# Altium PCB 403.5MHz_LNA.PcbDoc
Units mil, origin at the board's own origin, x right, y up, seen from the top; angles counter-clockwise.
Board outline 1897.64 x 1078.74 mil, 2 copper layers (Top Layer, Bottom Layer), stack 26.422 mil thick; 35 components, 14 nets, 115 pads, 114 vias.
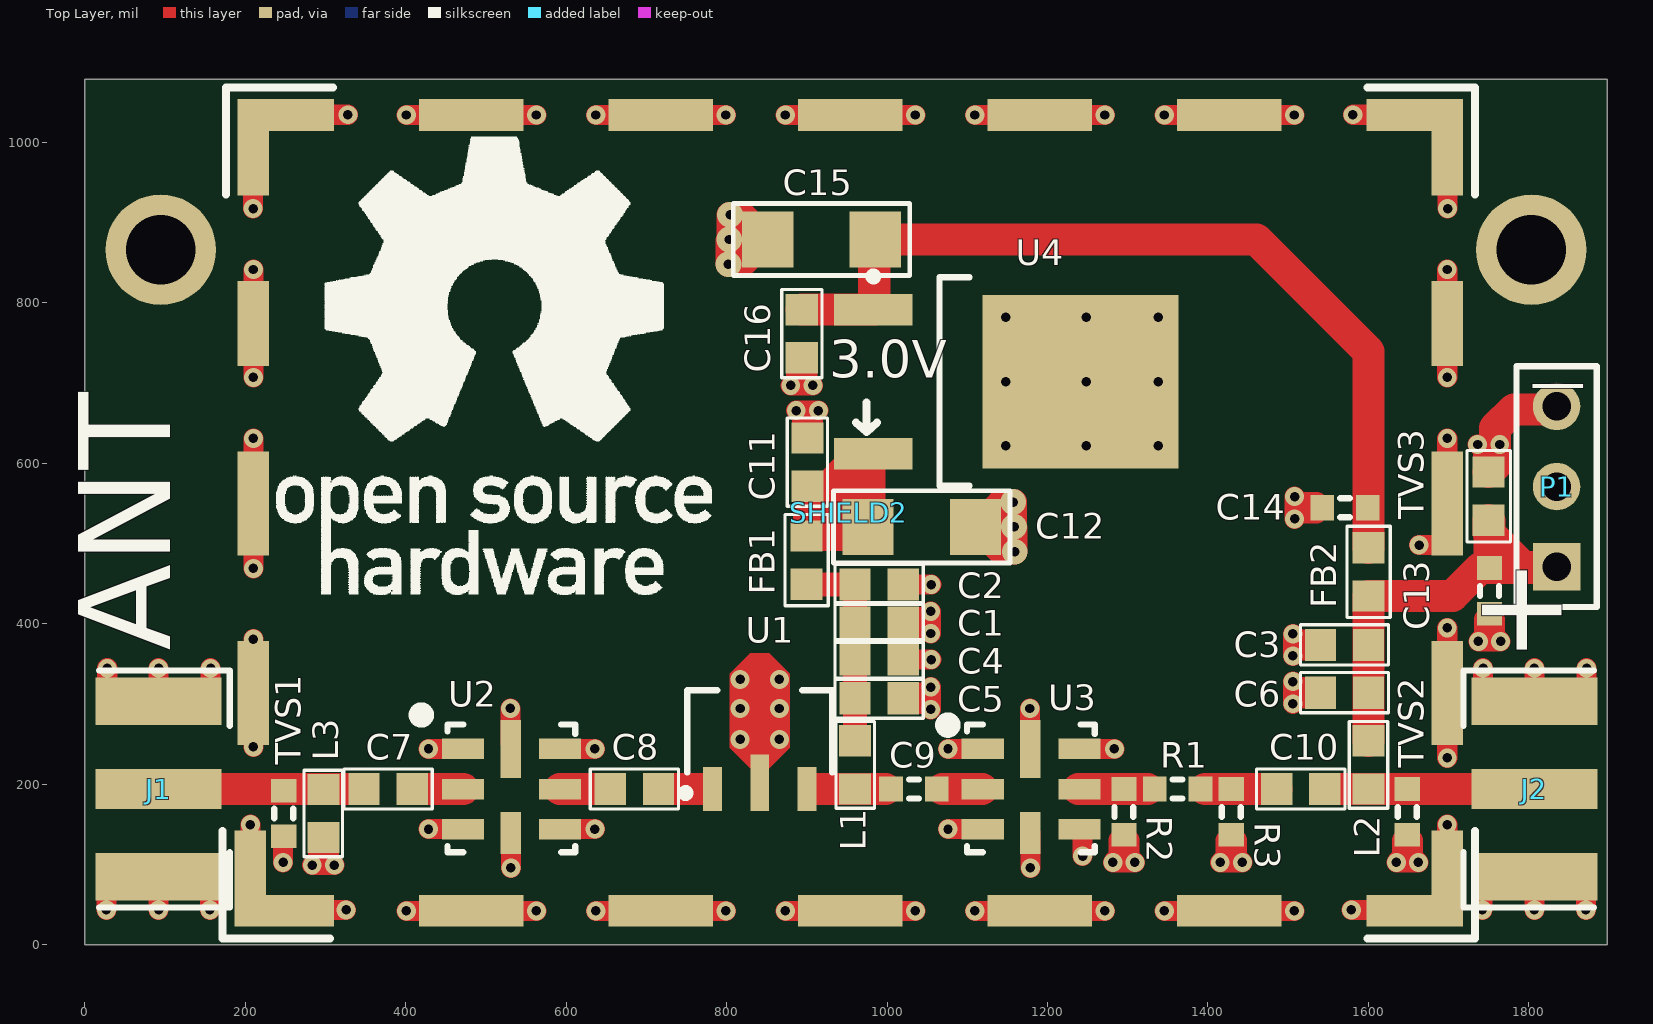
[diagram p0: Top Layer view]
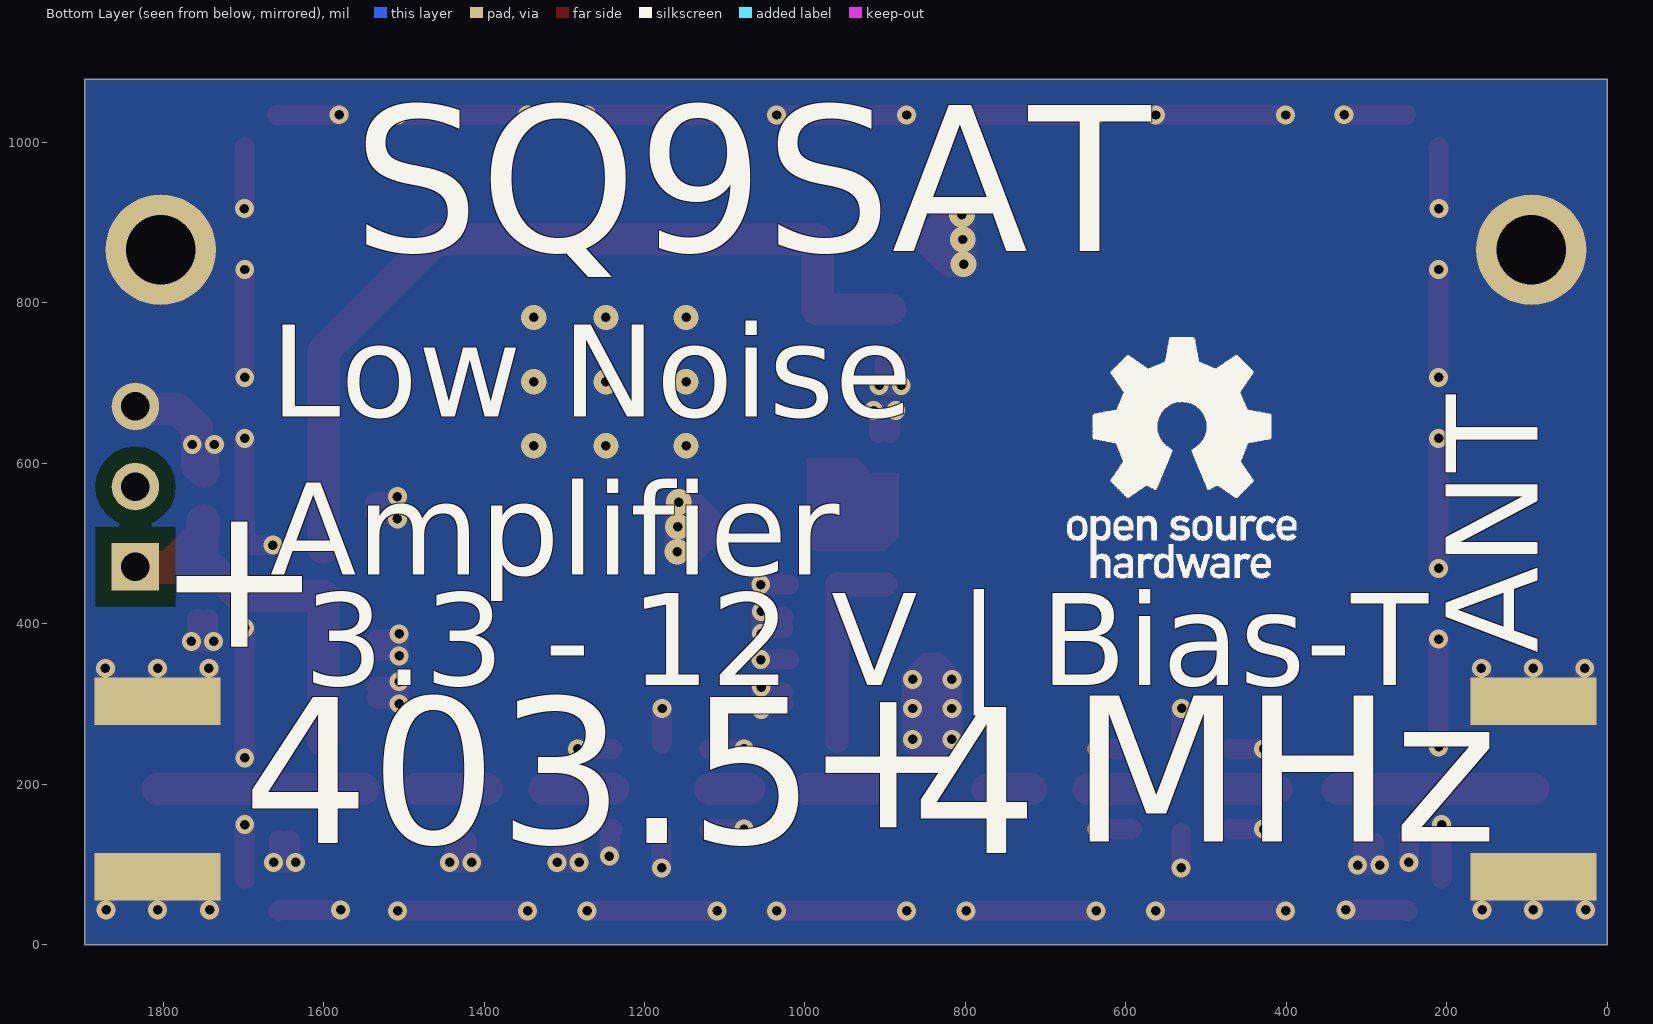
[diagram p1: Bottom Layer view, seen from below]
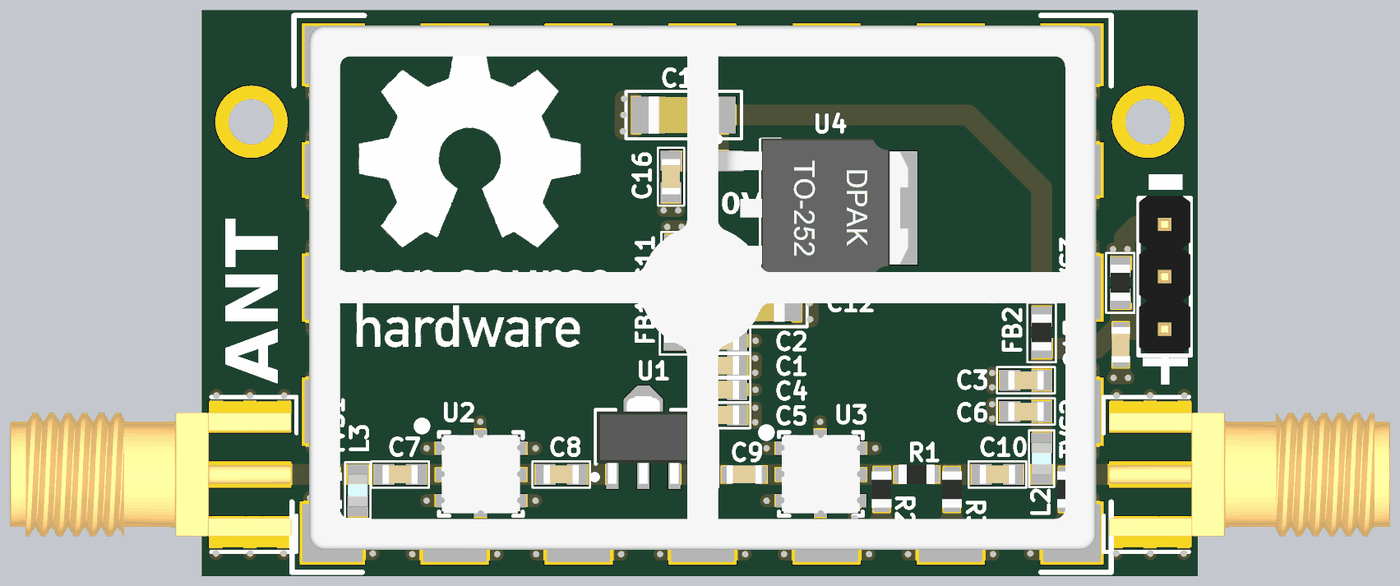
[diagram p2: 3D render of the assembled board from above, using the file's embedded part models]

## Layer stack, top to bottom
Top Solder: solder mask 0.4, Solder Resist, Dk 3.5
Top Layer: signal copper 1.4
Dielectric 1: core 23.622, FR-4, Dk 4.2
Bottom Layer: signal copper 1.4
Bottom Solder: solder mask 0.4, Solder Resist, Dk 3.5

## Board outline
0,0 0,1078.74 1897.64,1078.74 1897.64,0

## Design rules (kind name [scope] priority, off if disabled: settings)
AssemblyTestPointUsage [All] p1 off:
AssemblyTestpoint [All] p1 off: testpointundercomponent=TRUE minsize=40 maxsize=100 preferedsize=60 minholesize=0 maxholesize=40 preferedholesize=32 testpointgrid=1 usegrid=TRUE gridtolerance=0.01 allowsidetop=TRUE allowsidebottom=TRUE
Clearance [All] p1: gap=6 ignorepadtopadclearanceinfootprint=FALSE except(20: Arc-Poly Track-Poly SMDPad-Poly THPad-Poly Via-Poly Fill-Poly Poly-Poly Poly-Region Poly-Text Poly-Hole)
ComponentClearance R3_R4 [InComponent('R3') vs InComponent('R4')] p1: gap=0 collisioncheckmode=3 verticalgap=0 showdistances=FALSE
ComponentClearance R1_R2 [InComponent('R1') vs InComponent('R2')] p2: gap=0 collisioncheckmode=3 verticalgap=0 showdistances=FALSE
ComponentClearance ComponentClearance_PAD_08mm [HasFootprint('PAD_08mm')] p3: gap=0 collisioncheckmode=3 verticalgap=0 showdistances=FALSE
ComponentClearance ComponentClearance_1 [All vs InComponent('J4')] p4: gap=0 collisioncheckmode=3 verticalgap=0 showdistances=FALSE
ComponentClearance [All] p5: gap=10 collisioncheckmode=3 verticalgap=10 showdistances=FALSE
FabricationTestPointUsage [All] p1 off: valid=0 allowmultiple=FALSE
FabricationTestpoint [All] p1 off: side=3 testpointundercomponent=TRUE minsize=40 maxsize=100 preferedsize=60 minholesize=0 maxholesize=40 preferedholesize=32 testpointgrid=1 allowsidetop=TRUE allowsidebottom=TRUE usegrid=TRUE gridtolerance=0.01
HoleSize [All] p1: absolutevalues=TRUE maxlimit=157.48 minlimit=11.81 maxpercent=80.000 minpercent=20.000
Length "InNet('USBDP_CON') Or InNet('USBDM_CON')" [InNet('USBDP_CON') Or InNet('USBDM_CON')] p1: maxlimit=650 minlimit=550
MinimumSolderMaskSliver MSOP8_TSSOP8_3X3 [HasFootprint('MSOP8_TSSOP8_3X3')] p1: minsoldermaskwidth=3
MinimumSolderMaskSliver DFN8_3.0x2.0 [HasFootprint('DFN8_3.0x2.0')] p2: minsoldermaskwidth=3
MinimumSolderMaskSliver 6L2MM [HasFootprint('6L2MM')] p3: minsoldermaskwidth=3
MinimumSolderMaskSliver QFN16_3x3 [HasFootprint('QFN16_3x3')] p4: minsoldermaskwidth=3
MinimumSolderMaskSliver 0915LP15B026 [HasFootprint('0915LP15B026')] p5: minsoldermaskwidth=3
MinimumSolderMaskSliver PD0810J5050S2HF [HasFootprint('PD0810J5050S2HF')] p6: minsoldermaskwidth=3
MinimumSolderMaskSliver [All] p7: minsoldermaskwidth=6
PlaneClearance [All] p1: clearance=9.84
PlaneConnect PlaneConnect_via [All] p1: planeconnectstyle=Direct reliefexpansion=20 reliefentries=4 reliefconductorwidth=10 reliefairgap=10
PlaneConnect [All] p2: planeconnectstyle=Relief reliefexpansion=20 reliefentries=4 reliefconductorwidth=10 reliefairgap=10
PolygonConnect PolygonConnect_1 [HasFootprint('BMI-S-205-F')] p1: connectstyle=Direct reliefconductorwidth=10 reliefentries=4 polygonreliefangle="90 Angle" airgapwidth=10
PolygonConnect PolygonConnect_via [isVia] p2: connectstyle=Direct reliefconductorwidth=10 reliefentries=4 polygonreliefangle="90 Angle" airgapwidth=10
PolygonConnect [All] p3: connectstyle=Direct reliefconductorwidth=20 reliefentries=4 polygonreliefangle="90 Angle" airgapwidth=12
RoutingVias [All] p1: holewidth=5.91 width=21.65 viastyle="Through Hole" minholewidth=11.81 minwidth=23.62 maxholewidth=39.37 maxwidth=50
SilkToSilkClearance [All] p1: silktosilkclearance=1
SilkToSolderMaskClearance [IsPad] p1: minsilkscreentomaskgap=0 clearancetoexposedcopper=TRUE
SolderMaskExpansion [All] p1: expansion=2
Width [All] p1: maxlimit=118.11 minlimit=5.91 preferedwidth=9.84
19 further rules are at their usual default settings.

## Classes and differential pairs
net class "50 ohm": NetC7_1 NetC7_2 NetC8_1 NetC8_2 NetC9_1 NetC9_2 NetC10_1 NetR1_1

## Components (designator, comment, footprint, x,y, rotation, side; value= is the part's Value field where it differs from the comment)
C1 "Ceramic X7R" C_0603_1608#1 990.16,401.57 r180 top value=100nF
C2 "Ceramic X7R" C_0603_1608#1 990.16,448.82 r0 top value=1uF
C3 "Ceramic C0G" C_0603_1608#1 1570.24,373.63 r180 top value=1nF
C4 "Ceramic C0G" C_0603_1608#1 990.16,355.32 r180 top value=1nF
C5 "Ceramic C0G" C_0603_1608#1 990.16,307.09 r0 top value=100pF
C6 "Ceramic C0G" C_0603_1608#1 1570.24,313.98 r180 top value=100pF
C7 "Ceramic C0G" C_0603_1608#1 377.95,193.9 r0 top value=100pF
C8 "Ceramic C0G" C_0603_1608#1 685.04,193.9 r0 top value=100pF
C9 "Ceramic C0G" C_0603_1608#2 1033.46,193.91 r0 top value=100pF
C10 "Ceramic C0G" C_0603_1608#1 1515.75,193.9 r0 top value=100pF
C11 "Ceramic X7R" C_0603_1608#1 900.59,601.38 r90 top value=1uF
C12 "Ceramic X7R" C_1206_3216 1043.31,520.67 r0 top value=10uF
C13 "Ceramic C0G" C_0603_1608#2 1750.98,440.94 r270 top value=100pF
C14 "Ceramic C0G" C_0603_1608#2 1570.87,544.56 r180 top value=100pF
C15 "Ceramic X7R" C_1206_3216 918.31,878.94 r180 top value=10uF
C16 "Ceramic X7R" C_0603_1608#1 893.7,761.54 r270 top value=1uF
FB1 "Ferrite bead" FB_0603_1608 899.61,479.33 r270 top value=BLM18AG601SN1
FB2 "Ferrite bead" FB_0603_1608 1600.24,464.57 r90 top value=BLM18AG601SN1
J1 "SMA EDGE" J_SMA_EDGE_6.25 13.13,193.91 r0 top value=RF2-143-T-17-50-G
J2 "SMA EDGE" J_SMA_EDGE_6.25 1885.83,193.91 r180 top value=RF2-143-T-17-50-G
L1 "Inductor" L_0603_1608 960.29,223.91 r90 top value=220nH
L2 "Inductor" L_0603_1608 1600.24,223.91 r90 top value=220nH
L3 "Inductor" L_0603_1608 297.24,163.39 r90 top value=220nH
P1 "Goldpin" P_HEADER_1x3_2.54 1834.65,470.87 r90 top value=DS1021-1*3SF1-1
R1 "Resistor" R_0603_1608#1 1362.2,193.91 r0 top value=18R
R2 "Resistor" R_0603_1608#1 1295.28,165.37 r90 top value=270R
R3 "Resistor" R_0603_1608#1 1429.13,165.37 r90 top value=270R
SHIELD2 "EMI Shield" BMI-S-205-F 954.22,549.91 r0 top locked value=BMI-S-205-F
TVS1 "TVS bidirectional" R_0603_1608#1 248.03,163.39 r270 top value=0603ESDA-MLP7
TVS2 "TVS bidirectional" R_0603_1608#1 1648.62,165.35 r270 top value=0603ESDA-MLP7
TVS3 "0603ESDA2" R_0603_1608#2 1750,559.06 r90 top value=0603ESDA2-TR2
U1 "PGA103+" SOT89_TO-243AA_N 841.29,264.78 r0 top value=PGA-103+
U2 "RF1419D" SAW_QCC8B_SM3838-8_3.8x3.8 471.65,243.91 r0 top
U3 "RF1419D" SAW_QCC8B_SM3838-8_3.8x3.8 1119.29,243.9 r0 top
U4 "AP2213D-3.0" DPAK_TO252-3_SC63_M 1148.14,701.77 r0 top value=AP2213D-3.0TRG1

## Footprints (in the part's own frame and the unit in brackets; to place one, negate y for a bottom-side part, rotate by r counter-clockwise, add the part's x,y. Pads: shape width x height; smd on the part's side, far side on the other; paste and mask are expansions set on the pad)
BMI-S-205-F [mm]
  rect 1x3.05 smd paste-0.127: 1(-19,-11.875) 1(-18.9,11.275) 1(18.9,-11.875) 1(18.9,11.275)
  rect 1x3.3 smd paste-0.127: 1(-18.9,-6) 1(-18.9,0) 1(18.9,-6) 1(18.9,0)
  rect 1x2.7 smd paste-0.127: 1(-18.9,5.7) 1(18.9,5.7)
  rect 3.15x1 smd paste-0.127: 1(-17.925,-12.9)
  rect 3.05x1 smd paste-0.127: 1(-17.875,12.3) 1(17.875,-12.9) 1(17.875,12.3)
  rect 3.3x1 smd paste-0.127: 1(-12,-12.9) 1(-12,12.3) 1(-6,-12.9) 1(-6,12.3) 1(0,-12.9) 1(0,12.3) 1(6,-12.9) 1(6,12.3) 1(12,-12.9) 1(12,12.3)
  silkscreen extent -19.87,-13.78 19.77,13.18, body extent -19.05,-12.7 19.05,12.7, height 6
C_0603_1608#1 [mil]
  rect 39x40 smd: 1(-30,0) 2(30,0)
  silkscreen extent -55,-25 55,25, body extent -33,-18 33,18, height 35
C_0603_1608#2 [mil]
  rect 29.53x31.5 smd: 1(-28.54,0) 2(28.54,0)
  silkscreen extent -6,-12 6,12, body extent -33,-18 33,18, height 35
C_1206_3216 [mil]
  rect 64x70 smd: 1(-67,0) 2(67,0)
  silkscreen extent -110,-45 110,45, body extent -67,-35 67,35, height 39
DPAK_TO252-3_SC63_M [mm] "D-PAK, 3-Pads+1-heatsink, Body 6,20x6,60mm (max), IPC Medium Density"
  rect 2.5x1 smd: 1(-4.2,2.28) 3(-4.2,-2.28)
  rect 6.2x5.5 smd: 2(2.362,0)
  silkscreen extent -4.32,-3.3 -1.15,3.45, body extent -5.08,-3.37 5.02,3.37, height 2.37
FB_0603_1608 [mil]
  rect 39x40 smd: 1(-30,0) 2(30,0)
  silkscreen extent -57,-27 57,27, body extent -34,-19 34,19, height 21
J_SMA_EDGE_6.25 [mm]
  rect 4x1.27 smd paste-5: 1(2,0)
  rect 4x1.5 smd paste-5: 2(2,-2.775) 2(2,2.775)
  rect 4x1.5 smd far side paste-5: 2(2,-2.775) 2(2,2.775)
  silkscreen extent 0.13,-3.75 4.25,3.75, body extent -9.6,-3 4,3, height 3.5
L_0603_1608 [mil]
  rect 39x40 smd: 1(-30,0) 2(30,0)
  silkscreen extent -54,-24 54,24, body extent -31,-20 32,20, height 31
P_HEADER_1x3_2.54 [mm] "Connector; Header; 3 Position, Male"
  rect 1.5x1.5 hole 0.9: 1(0,0)
  round 1.5 hole 0.9: 2(2.54,0) 3(5.08,0)
  silkscreen extent -1.27,-1.27 6.35,1.27, body extent -1.17,-1.25 6.45,1.25, height 8.2
R_0603_1608#1 [mm]
  rect 0.75x0.8 smd: 1(-0.725,0) 2(0.725,0)
  silkscreen extent -0.15,-0.3 0.15,0.3, body extent -0.87,-0.47 0.88,0.48, height 0.54
R_0603_1608#2 [mm]
  rect 0.991x1.016 smd: 1(-0.762,0) 2(0.762,0)
  silkscreen extent -1.45,-0.69 1.45,0.69, body extent -0.87,-0.47 0.88,0.48, height 0.54
SAW_QCC8B_SM3838-8_3.8x3.8 [mm]
  rect 1.33x0.65 smd: 1(0,0) 2(0,-1.27) 3(0,-2.54) 5(3.07,-2.54) 6(3.07,-1.27) 7(3.07,0)
  rect 0.65x1.33 smd: 4(1.51,-2.667)
  rect 0.65x1.83 smd: 8(1.51,0)
  silkscreen extent -1.45,-3.27 3.55,1.2, body extent -0.37,-3.15 3.43,0.65, height 1.52
SOT89_TO-243AA_N [mm] "SOT89, 3-Leads, Body 4,50x2,45mm, Pitch 1,50mm, Lead Span 4,1mm, IPC Medium Density"
  rect 0.6x1.4 smd: 1(-1.5,-1.8) 3(1.5,-1.8)
  rect 0.6x1.8 smd: 2(0,-1.6)
  Top Layer region: -0.228,-1.219 -0.95,-0.498 -0.95,1.85 -0.3,2.5 0.3,2.5 0.95,1.85 0.95,-0.498 0.229,-1.219
  silkscreen extent -2.47,-2.05 2.3,1.32, body extent -2.25,-2.25 2.25,3.05, height 1.59

## Part data
C1: library part C_100nF_50V_X7R_0603_5, "Capacitor", Dielectric=X7R, Manufacturer=Samsung, Manufacturer Part Number=CL10B104JB8NNNC, Tolerance (%)=5, Voltage=50V, HelpURL=http://www.tme.eu/pl/Document/4a42202b32dab16128fe107dd69598cc/samsung-chip-cap.pdf, Part Number=C_100nF_50V_X7R_0603_5, SCH_Footprint=0603, Supplier 1=TME, Supplier 2="RS Components", Supplier 3=Farnell, Supplier 4=Mouser, Supplier 5=Digi-Key, Supplier Part Number 1=CL10B104JB8NNNC
C2 C11 C16: library part C_1uF_25V_X7R_0603_10, "Capacitor", Dielectric=X7R, Manufacturer=Samsung, Manufacturer Part Number=CL10B105KA8NNNC, Tolerance (%)=10, Voltage=25V, HelpURL=http://www.tme.eu/pl/Document/4a42202b32dab16128fe107dd69598cc/samsung-chip-cap.pdf, Part Number=C_1uF_25V_X7R_0603_10, SCH_Footprint=0603, Supplier 1=TME, Supplier 2="RS Components", Supplier 3=Farnell, Supplier 4=Mouser, Supplier 5=Digi-Key, Supplier Part Number 1=CL10B105KA8NNNC
C3 C4: library part C_1nF_50V_C0G_0603_5, "Capacitor", Dielectric=C0G, Manufacturer=Samsung, Manufacturer Part Number=CL10C102JB8NNNC, Tolerance (%)=5, Voltage=50V, HelpURL=http://www.tme.eu/pl/Document/7da762c1dbaf553c64ad9c40d3603826/mlcc_samsung.pdf, Part Number=C_1nF_50V_C0G_0603_5, SCH_Footprint=0603, Supplier 1=TME, Supplier 2="RS Components", Supplier 3=Farnell, Supplier 4=Mouser, Supplier 5=Digi-Key, Supplier Part Number 1=CL10C102JB8NNNC
C5 C6 C7 C8 C9 C10 C13 C14: library part C_100pF_50V_C0G_0603_5, "Capacitor", Dielectric=C0G, Manufacturer=Walsin, Manufacturer Part Number=RF18N101J500CT, Tolerance (%)=5, Voltage=50V, HelpURL=https://pl.mouser.com/datasheet/2/210/Microwave_Caps-1535561.pdf, Part Number=C_100pF_50V_C0G_0603_5, SCH_Footprint=0603, Supplier 1=TME, Supplier 2="RS Components", Supplier 3=Farnell, Supplier 4=Mouser, Supplier 5=Digi-Key
C12 C15: library part C_10uF_25V_X7R_1206_10, "Capacitor", Dielectric=X7R, Manufacturer="Samsung Electro-Mechanics", Manufacturer Part Number=CL31B106KAHNNNE, Tolerance (%)=10, Voltage=25V, HelpURL=http://www.tme.eu/pl/Document/4a42202b32dab16128fe107dd69598cc/samsung-chip-cap.pdf, Part Number=C_10uF_25V_X7R_1206_10, SCH_Footprint=1206, Supplier 1=TME, Supplier 2="RS Components", Supplier 3=Farnell, Supplier 4=Mouser, Supplier 5=Digi-Key, Supplier Part Number 1=CL31B106KAHNNNE
FB1 FB2: library part FB_BLM18AG601SN1, "Ferrite Bead", Current=0A5, Manufacturer=Murata, Manufacturer Part Number=BLM18AG601SN1D, Resistance=600R, HelpURL=http://datasheet.octopart.com/BLM18AG601SN1D-Murata-datasheet-11743096.pdf, Part Number=FB_BLM18AG601SN1, SCH_Footprint=0603, Supplier 1=TME, Supplier 2="RS Components", Supplier 3=Farnell, Supplier 4=Mouser, Supplier 5=Digi-Key, Supplier Part Number 2=7241299P, Supplier Part Number 3=1515679, Supplier Part Number 4=81-BLM11A601S, Supplier Part Number 5=490-1014-1-ND
J1 J2: library part J_SMA_EDGE_6.25, "SMA connector", Manufacturer="Adam Tech", Manufacturer Part Number=RF2-143-T-17-50-G, Component Type=Standard, HelpURL=http://www.tme.eu/pl/Document/5895dbb620da9c3499391e7670c4adea/RF2-143-T-17-50-G.pdf, Part Number=J_SMA_EDGE_6.25, SCH_Footprint="SMA EDGE", Supplier 1=TME, Supplier 2="RS Components", Supplier 3=Farnell, Supplier 4=Mouser, Supplier 5=Digi-Key, Supplier Part Number 1=RF2-143-T-17-50-G
L1 L2 L3: library part L_220nH_120mA_0603, "Induction", Current=120mA, Manufacturer=Murata, Manufacturer Part Number=LQW18ANR22G00D, Resistance=2.5R, HelpURL=https://datasheet.octopart.com/LQW18ANR22G00D-Murata-datasheet-11553032.pdf, Part Number=L_220nH_120mA_0603, SCH_Footprint=0603, Supplier 1=TME, Supplier 2="RS Components", Supplier 3=Farnell, Supplier 4=Mouser, Supplier 5=Digi-Key, Supplier Part Number 1=LQW18ANR22G00D, Supplier Part Number 2=7242872, Supplier Part Number 3=9528059, Supplier Part Number 4=81-LQW18ANR22G00D, Supplier Part Number 5=490-6931-1-ND
P1: library part P_HEADER_1x3_2.54, "Header, 3-Pin", Manufacturer=Connfly, Manufacturer Part Number=DS1021-1*3SF1-1, Supplier Part Number 1=ZL201-03G, Component Type=Standard, HelpURL=http://www.tme.eu/en/Document/cc301e58a5da78cb543a94b5a5b7f06a/DS1021.pdf, Part Number=P_HEADER_1x3_2.54, SCH_Footprint="1x3 2.54mm", Supplier 1=TME, Supplier 2="RS Components", Supplier 3=Farnell, Supplier 4=Mouser, Supplier 5=Digi-Key
R1 R2 R3: library part R_GENERIC_0603, Part Number=R_GENERIC_0603, SCH_Footprint=0603, Supplier 1=TME, Supplier 2="RS Components", Supplier 3=Farnell, Supplier 4=Mouser, Supplier 5=Digi-Key
SHIELD2: library part SHIELD_BMI-S-205-F, "Shield, 1 pad", Manufacturer=Laird, Manufacturer Part Number=BMI-S-205-F, HelpURL=https://assets.lairdtech.com/home/brandworld/files/Board%20Level%20Shields%20Catalog%20Download.pdf, Part Number=SHIELD_BMI-S-205-F, SCH_Footprint=38.1x25.4mm, Supplier 1=TME, Supplier 2="RS Components", Supplier 3=Farnell, Supplier 4=Mouser, Supplier 5=Digi-Key, Supplier Part Number 3=2497723, Supplier Part Number 4=739-BMIS-205-F, Supplier Part Number 5=903-1054-1-ND
TVS1 TVS2: library part TVS_0603ESDA-MLP7, Manufacturer=Bussmann, Manufacturer Part Number=0603ESDA-MLP7, Voltage=30V, HelpURL=https://datasheet.octopart.com/0603ESDA-MLP7-Eaton-datasheet-12528739.pdf, Part Number=TVS_0603ESDA-MLP7, SCH_Footprint=0603, Supplier 1=TME, Supplier 2="RS Components", Supplier 3=Farnell, Supplier 4=Mouser, Supplier 5=Digi-Key
TVS3: library part TVS_0603ESDA2, Current=30A, Manufacturer=Bussmann, Manufacturer Part Number=0603ESDA2-TR2, Voltage=14V, HelpURL=http://www.cooperindustries.com/content/dam/public/bussmann/Electronics/Resources/product-datasheets/bus-elx-ds-4419-0603esda2-tr2.pdf, Part Number=TVS_0603ESDA2, SCH_Footprint=0603, Supplier 1=TME, Supplier 2="RS Components", Supplier 3=Farnell, Supplier 4=Mouser, Supplier 5=Digi-Key, Supplier Part Number 1=0603ESDA2-TR2, Supplier Part Number 4=504-0603ESDA2-TR2, Supplier Part Number 5=283-4156-1-ND
U1: library part U_PGA103+, Manufacturer=Mini-Circuits, Manufacturer Part Number=PGA-103+, HelpURL=https://ww2.minicircuits.com/pdfs/PGA-103+.pdf, Part Number=U_PGA103+, SCH_Footprint=SOT89, Supplier 1=TME, Supplier 2="RS Components", Supplier 3=Farnell, Supplier 4=Mouser, Supplier 5=Digi-Key
U2 U3: library part U_RF1419D, Center Frequency (MHz)=403.5, Manufacturer=Murata, Max Power (dBm)=10, Bandwidth (MHz)=7.5, HelpURL=https://wireless.murata.com/datasheet?/RFM/data/rf1419d.pdf, Manufacturer Part Number=RF1419D, Part Number=U_RF1419D, SCH_Footprint=SM3838, Supplier 1=TME, Supplier 2="RS Components", Supplier 3=Farnell, Supplier 4=Mouser, Supplier 5=Digi-Key, Supplier Part Number 2=9082736, Supplier Part Number 4=719-RF1419D, Supplier Part Number 5=583-1065-1-ND
U4: library part VL_AP2213D-3.0TRG1, Current=0.5A, Manufacturer="Diodes Inc", Manufacturer Part Number=AP2213D-3.0TRG1, Voltage=3V, HelpURL=https://pl.mouser.com/datasheet/2/115/AP2213-318105.pdf, Part Number=VL_AP2213D-3.0TRG1, SCH_Footprint=DPAK, Supplier 1=TME, Supplier 2="RS Components", Supplier 3=Farnell, Supplier 4=Mouser, Supplier 5=Digi-Key, Supplier Part Number 4=621-AP2213D-3.0TRG1, Supplier Part Number 5=AP2213D-3.0TRG1-ND

## Free pads (board coordinates)
  round 137.8 hole 86.61: 7(94.49,866.14) 7(1803.15,866.14)

## Via types
v1: diameter 23.62, hole 11.81, Top Layer to Bottom Layer, tented both sides, 99 vias
v2: diameter 31.5, hole 11.81, Top Layer to Bottom Layer, tented bottom, 9 vias
v3: diameter 32, hole 11.81, Top Layer to Bottom Layer, tented both sides, 6 vias

## Nets (pads, with @x,y where several pads share a name; then routed paths per layer and width w, separated by ;. In a path a pad name is that pad's centre, name@x,y a point inside that pad or via, vN(x,y) a via of type N, cw(c..) or ccw(c..) an arc to the next point about the centre after c; other vN are vias at no path point)
+3V: C11.1 C12.1 FB1.1 U4.3
GND: C1.1 C2.2 C3.2 C4.1 C5.2 C6.2 C11.2 C12.2 C13.2 C14.2 C15.2 C16.2 J1.2 J2.2 L3.1 P1.3 pad.7 R2.1 R3.1 SHIELD2.1 TVS1.2 TVS2.2 TVS3.2 U1.2 U2.1 U2.3 U2.4 U2.5 U2.7 U2.8 U3.1 U3.3 U3.4 U3.5 U3.7 U3.8 U4.2 | length 6140.3
  Top Layer w25: v1(26.92,43.34) J1.2@26.92,84.66 ; J1.2@27.87,303.17 v1(27.87,344.49) ; J1.2@91.85,303.15 v1(91.85,344.47) ; v1(91.88,43.35) J1.2@91.88,84.68 ; v1(155.86,43.34) J1.2@155.86,84.66 ; J1.2@156.81,303.17 v1(156.81,344.49) ; SHIELD2.1@206.19,82.39 v1(206.19,149.61) ; v1(209.62,917.32) 209.62,993.31 SHIELD2.1@210.13,993.81 ; v1(210.13,246.48) 210.13,313.69 v1(210.13,380.91) ; v1(210.13,468.92) 210.13,549.91 v1(210.13,630.91) ; v1(210.13,707.11) 210.13,774.32 v1(210.13,841.54) ; v1(247.05,102.36) 247.05,133.86 TVS1.2 ; SHIELD2.1@248.51,42.04 249.83,43.35 v1(325.79,43.35) ; SHIELD2.1@250.48,1034.17 250.76,1034.45 v1(327.73,1034.45) ; L3.1@290.35,127 290.35,105.94 v1(283.46,99.05) v1(311.02,99.05) 304.13,105.94 L3.1@304.13,127 ; v1(400.79,42.04) 481.78,42.04 v1(562.77,42.04) ; v1(400.79,1034.17) 481.78,1034.17 v1(562.77,1034.17) ; v1(428.35,143.91) U2.3 ; v1(428.35,243.91) U2.1 ; U2.8@530.51,251 v1(530.51,294.31) ; v1(531.09,95.61) U2.4 ; U2.5 v1(635.83,143.91) ; U2.7 v1(635.83,243.91) ; v1(637.01,42.04) 718,42.04 v1(798.99,42.04) ; v1(637.01,1034.17) 718,1034.17 v1(798.99,1034.17) ; v1(873.23,42.04) 954.22,42.04 v1(1035.21,42.04) ; v1(873.23,1034.17) 954.22,1034.17 v1(1035.21,1034.17) ; C16.2@886.81,725.15 886.81,704.09 v1(879.92,697.2) v1(907.48,697.2) 900.59,704.09 C16.2@900.59,725.15 ; C11.2@893.7,637.77 893.7,658.82 v1(886.81,665.71) v1(914.37,665.71) 907.48,658.82 C11.2@907.48,637.77 ; C4.1 v1(1055.12,355.32) ; C2.2 v1(1055.12,448.82) ; C5.2@1026.55,300.2 1047.6,300.2 v1(1054.49,293.31) v1(1054.49,320.87) 1047.6,313.98 C5.2@1026.55,313.98 ; C1.1@1026.55,394.68 1047.6,394.68 v1(1054.49,387.8) v1(1054.49,415.35) 1047.6,408.46 C1.1@1026.55,408.46 ; v1(1075.98,143.9) U3.3 ; v1(1075.98,243.9) U3.1 ; v1(1109.45,42.04) 1190.44,42.04 v1(1271.43,42.04) ; v1(1109.45,1034.17) 1190.44,1034.17 v1(1271.43,1034.17) ; U3.8@1178.15,250.98 v1(1178.15,294.29) ; v1(1178.72,95.6) U3.4 ; U3.5 1243.8,143.9 1244.09,143.6 1243.8,143.31 v1(1243.8,110.24) ; U3.7 v1(1283.46,243.9) ; R2.1@1288.39,130.44 1288.39,109.39 v1(1281.5,102.5) v1(1309.05,102.5) 1302.17,109.39 R2.1@1302.17,130.44 ; v1(1345.67,42.04) 1426.66,42.04 v1(1507.65,42.04) ; v1(1345.67,1034.17) 1426.66,1034.17 v1(1507.65,1034.17) ; R3.1@1422.24,130.44 1422.24,109.39 v1(1415.35,102.5) v1(1442.91,102.5) 1436.02,109.39 R3.1@1436.02,130.44 ; C6.2@1533.85,307.09 1512.8,307.09 v1(1505.91,300.2) v1(1505.91,327.76) 1512.8,320.87 C6.2@1533.85,320.87 ; C3.2@1533.85,366.74 1512.8,366.74 v1(1505.91,359.85) v1(1505.91,387.41) 1512.8,380.52 C3.2@1533.85,380.52 ; C14.2@1535.93,537.67 1514.88,537.67 v1(1507.99,530.78) v1(1507.99,558.34) 1514.88,551.45 C14.2@1535.93,551.45 ; v1(1578.72,43.35) 1654.68,43.35 SHIELD2.1@1655.99,42.04 ; v1(1580.71,1034.45) 1657.68,1034.45 SHIELD2.1@1657.96,1034.17 ; TVS2.2@1641.73,130.42 1641.73,109.37 v1(1634.84,102.48) v1(1662.4,102.48) 1655.51,109.37 TVS2.2@1655.51,130.42 ; v1(1663.39,498.03) 1691.13,498.03 1698.31,505.22 1698.31,549.91 v1(1698.31,630.91) ; SHIELD2.1@1698.31,82.39 v1(1698.31,149.61) ; v1(1698.31,232.7) 1698.31,313.69 v1(1698.31,394.68) ; v1(1698.31,707.11) 1698.31,774.32 v1(1698.31,841.54) ; SHIELD2.1@1698.31,993.81 1698.82,993.31 v1(1698.82,917.32) ; v1(1742.13,43.32) J2.2@1742.13,84.65 ; J2.2@1743.11,303.15 v1(1743.11,344.47) ; TVS3.2@1743.11,595.44 1743.11,616.5 v1(1736.22,623.39) 1757.87,623.39 v1(1763.78,623.39) 1757.87,617.48 1756.89,616.5 1756.89,595.94 TVS3.2@1756.89,595.44 ; C13.2@1744.09,406.01 1744.09,384.96 v1(1737.2,378.07) v1(1764.76,378.07) 1757.87,384.96 C13.2@1757.87,406.01 ; J2.2@1761.12,303.17 1807.09,303.17 v1(1807.09,344.49) ; v1(1807.09,43.34) J2.2@1807.09,84.66 ; v1(1871.06,43.32) J2.2@1871.06,84.65 ; J2.2@1872.05,303.15 v1(1872.05,344.47)
  Top Layer w32: v3@803.31,909.94 v3(803.31,878.94) ; v3(804.31,909.94) C15.2@820.31,909.94 ; v3(1157.31,551.67) C12.2@1141.31,551.67 ; v3@1158.31,551.67 v3(1158.31,520.67) ; v3(802.31,847.94) 802.31,877.94 v3(803.31,878.94) ; v3(802.31,847.94) 833.31,878.94 C15.2 ; v3(802.31,847.94) 820.31,847.94 C15.2 ; v3(803.31,878.94) 820.31,895.94 C15.2@820.31,909.94 ; C15.2@820.31,909.94 C15.2 ; C12.2 C12.2@1141.31,551.67 ; C12.2 1141.31,489.67 v3(1159.31,489.67) ; C12.2 1128.31,520.67 v3(1159.31,489.67) ; C12.2@1141.31,551.67 1141.31,537.67 v3(1158.31,520.67) ; v3(1158.31,520.67) 1159.31,519.67 v3(1159.31,489.67)
  Top Layer w40: TVS3.2 1756.89,595.94 1757.87,596.93 1757.87,617.48 1757.87,623.39 1757.87,643.79 1781.31,667.22 1831,667.22 P1.3
  other v1: 816.93,255.91 865.65,255.91 816.93,294.29 865.65,294.29 816.93,330.71 865.65,330.71
  other v2: 1148.14,621.77 1248.14,621.77 1338.14,621.77 1148.14,701.77 1248.14,701.77 1338.14,701.77 1148.14,781.77 1248.14,781.77 1338.14,781.77
NetC1_2: C1.2 C2.1 C4.2 C5.1 FB1.2 L1.2 | length 255.7
  Top Layer w30: FB1.2 899.86,449.07 959.9,449.07 C2.1 C2.1 960.22,402.56 C4.2 C5.1 960.22,253.98 L1.2
NetC7_1: C7.1 J1.1 L3.2 TVS1.1 | length 244.2
  Top Layer w40: J1.1 248.03,193.91 297.24,193.91 C7.1@336.09,193.91
NetC7_2: C7.2 U2.2 | length 59.3
  Top Layer w40: C7.2@412.4,193.91 U2.2
NetC8_1: C8.1 U2.6 | length 54.1
  Top Layer w40: U2.6 C8.1@646.65,193.91
NetC8_2: C8.2 U1.1 | length 54.6
  Top Layer w40: C8.2@717.99,193.91 U1.1@772.64,193.91
NetC9_1: C9.1 L1.1 U1.3 | length 88.6
  Top Layer w40: U1.3@909.45,193.91 L1.1 C9.1@998.03,193.91
NetC9_2: C9.2 U3.2 | length 49.7
  Top Layer w40: C9.2@1068.9,193.91 U3.2@1118.57,193.91
NetC10_1: C10.1 R1.2 R3.2 | length 89.1
  Top Layer w40: R1.2@1396.65,193.91 R3.2 C10.1
NetC10_2: C10.2 J2.1 L2.1 TVS2.1 | length 256.9
  Top Layer w40: C10.2@1550.2,193.9 1586.46,193.9 L2.1 1644.68,193.9 J2.1
NetC14_1: C14.1 C15.1 C16.1 FB2.2 U4.1 | length 1095.6
  Top Layer w40: C16.1 U4.1 983.73,791.54 984.05,791.85 984.05,877.68 C15.1 1460.63,878.94 1600.24,739.33 FB2.2
NetR1_1: R1.1 R2.2 U3.6 | length 86.2
  Top Layer w40: U3.6@1238.6,193.77 1295.28,193.77 R1.1@1324.8,193.77
Vin: C3.1 C6.1 C13.1 FB2.1 L2.2 P1.1 TVS3.1 | length 607.8
  Top Layer w40: L2.2 C6.1 C3.1 FB2.1 1704.65,434.57 1739.57,469.49 C13.1 ; C13.1 TVS3.1@1750.98,512.8 ; C13.1 1833.27,469.49 P1.1 1792.91,470.87 TVS3.1@1750.98,512.8 ; TVS3.1@1750.98,512.8 1750,513.78 TVS3.1 1750.98,528.07 TVS3.1@1750.98,512.8
pads on no net: P1.2

## Polygon pours and split planes (outlines as drawn)
GND on Bottom Layer "Bottom Layer-GND" (solid, pour order 2): 0,1078.74 1897.64,1078.74 1897.64,0 0,0

## Other copper
Top Layer:
  region net +3V: 882.87,587.6 918.31,587.6 918.31,589.57 935.04,606.3 998.03,606.3 998.03,500 989.17,491.14 899.61,491.14 882.87,507.87

## Silkscreen, mask and mechanical layers (free items; w line width, h text height)
Top Overlay:
  drawing of 22 lines, arcs and shapes, not listed
  text "-" at 1879.92,811.02 h300 r180
  text "3.0V" at 928.15,690.72 h80
  text "ANT" at 144.68,366.14 h196.85 r90
  text "+" at 1878.94,350.39 h196.85 r90
Bottom Overlay:
  drawing of 18 lines, arcs and shapes, not listed
  text "-" at 1841.54,807.09 h393.7 r180
  text "SQ9SAT" at 1563.98,788.39 h400
  text "Low Noise  / Amplifier" at 1666.34,423.23 h196.85
  text "ANT" at 48.23,363.19 h196.85 r270
  text "+" at 1858.27,344.49 h393.7 r90
  text "3.3 - 12 V | Bias-T" at 1625,285.43 h196.85
  text "-" at 1038.25,171.61 h500 r180
  text "+" at 1050.25,119.61 h400 r90
  text "MHz" at 669.29,67.91 h314.96
  text "403.5" at 1700.79,65.94 h314.96
  text "4" at 867.25,53.61 h314.96
Mechanical 1:
  the board outline again, w15

## Text inside footprints (layer, text, board x,y; h text height)
C1: Mechanical 17 "d" at 1025.16,406.57 h10 r180; Mechanical 19 "-" at 1025.16,406.57 h10 r180
C2: Mechanical 17 "d" at 955.16,443.82 h10; Mechanical 19 "-" at 955.16,443.82 h10
C3: Mechanical 17 "d" at 1605.24,378.63 h10 r180; Mechanical 19 "-" at 1605.24,378.63 h10 r180
C4: Mechanical 17 "d" at 1025.16,360.32 h10 r180; Mechanical 19 "-" at 1025.16,360.32 h10 r180
C5: Mechanical 17 "d" at 955.16,302.09 h10; Mechanical 19 "-" at 955.16,302.09 h10
C6: Mechanical 17 "d" at 1605.24,318.98 h10 r180; Mechanical 19 "-" at 1605.24,318.98 h10 r180
C7: Mechanical 17 "d" at 342.95,188.9 h10; Mechanical 19 "-" at 342.95,188.9 h10
C8: Mechanical 17 "d" at 650.04,188.9 h10; Mechanical 19 "-" at 650.04,188.9 h10
C9: Mechanical 17 "d" at 998.46,188.91 h10; Mechanical 19 "-" at 998.46,188.91 h10
C10: Mechanical 17 "d" at 1480.75,188.9 h10; Mechanical 19 "-" at 1480.75,188.9 h10
C11: Mechanical 17 "d" at 905.59,566.38 h10 r90; Mechanical 19 "-" at 905.59,566.38 h10 r90
C12: Mechanical 17 "d" at 978.31,515.67 h15; Mechanical 19 "-" at 978.31,515.67 h15
C13: Mechanical 17 "d" at 1745.98,475.94 h10 r270; Mechanical 19 "-" at 1745.98,475.94 h10 r270
C14: Mechanical 17 "d" at 1605.87,549.56 h10 r180; Mechanical 19 "-" at 1605.87,549.56 h10 r180
C15: Mechanical 17 "d" at 983.31,883.94 h15 r180; Mechanical 19 "-" at 983.31,883.94 h15 r180
C16: Mechanical 17 "d" at 888.7,796.54 h10 r270; Mechanical 19 "-" at 888.7,796.54 h10 r270
FB1: Mechanical 17 "d" at 904.61,509.33 h10 r270; Mechanical 19 "-" at 884.61,509.33 h10 r270
FB2: Mechanical 17 "d" at 1595.24,434.57 h10 r90; Mechanical 19 "-" at 1615.24,434.57 h10 r90
J1: Mechanical 17 "d" at -354,175.21 h60; Mechanical 19 "-" at -354,175.21 h60
J2: Mechanical 17 "d" at 2252.95,212.61 h60 r180; Mechanical 19 "-" at 2252.95,212.61 h60 r180
L1: Mechanical 17 "d" at 975.29,183.91 h10 r90; Mechanical 19 "-" at 975.29,183.91 h10 r90
L2: Mechanical 17 "d" at 1615.24,183.91 h10 r90; Mechanical 19 "-" at 1615.24,183.91 h10 r90
L3: Mechanical 17 "d" at 312.24,123.39 h10 r90; Mechanical 19 "-" at 312.24,123.39 h10 r90
P1: Mechanical 17 "d" at 1864.65,425.87 h60 r90; Mechanical 19 "-" at 1864.65,425.87 h60 r90
R1: Mechanical 17 "d" at 1332.2,198.91 h10; Mechanical 19 "-" at 1332.2,178.91 h10
R2: Mechanical 17 "d" at 1290.28,135.37 h10 r90; Mechanical 19 "-" at 1310.28,135.37 h10 r90
R3: Mechanical 17 "d" at 1424.13,135.37 h10 r90; Mechanical 19 "-" at 1444.13,135.37 h10 r90
SHIELD2: Mechanical 17 "d" at 922.22,517.91 h60; Mechanical 19 "-" at 922.22,527.91 h60
TVS1: Mechanical 17 "d" at 253.03,193.39 h10 r270; Mechanical 19 "-" at 233.03,193.39 h10 r270
TVS2: Mechanical 17 "d" at 1653.62,195.35 h10 r270; Mechanical 19 "-" at 1633.62,195.35 h10 r270
TVS3: Mechanical 17 "d" at 1745,529.06 h10 r90; Mechanical 19 "-" at 1765,529.06 h10 r90
U1: Mechanical 17 "d" at 821.29,254.78 h25; Mechanical 19 "-" at 821.29,254.78 h25
U2: Mechanical 17 "d" at 436.09,208.91 h16; Mechanical 19 "-" at 462.8,159.27 h16
U3: Mechanical 17 "d" at 1083.72,208.9 h16; Mechanical 19 "-" at 1110.43,159.25 h16
U4: Mechanical 17 "d" at 1108.14,611.77 h25; Mechanical 19 "-" at 1108.14,611.77 h25